# EAGLE board Schematic_Sensing_Module (EAGLE 9.6.2)
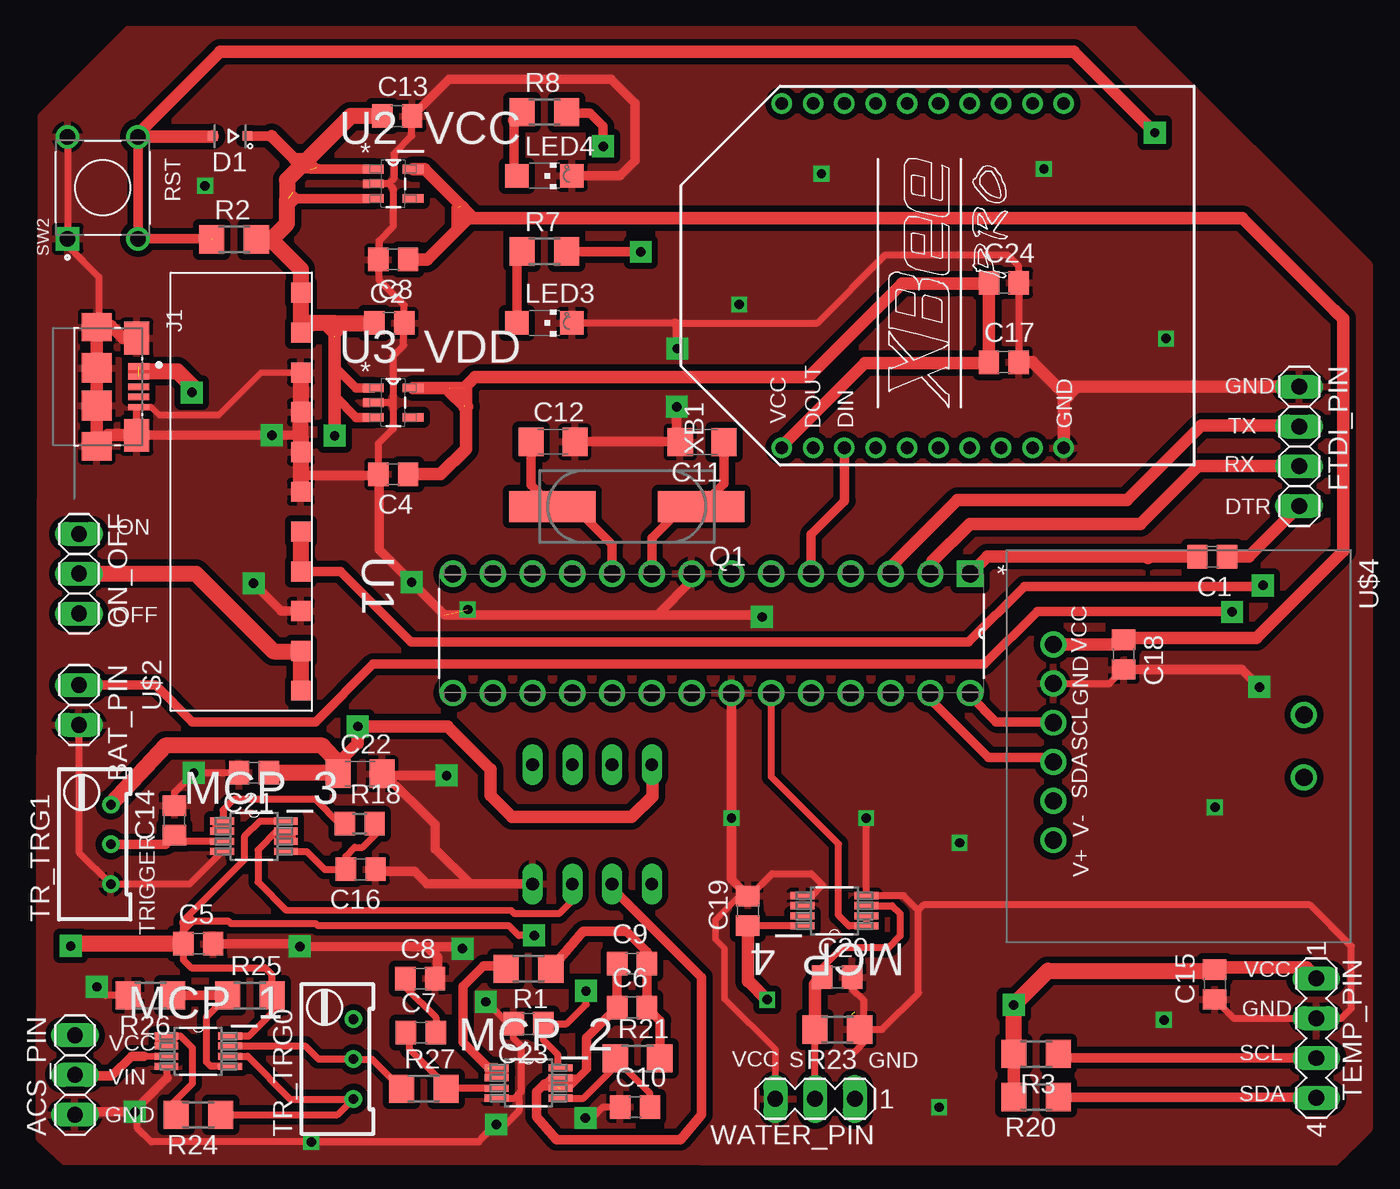
[diagram p0: board, top side]
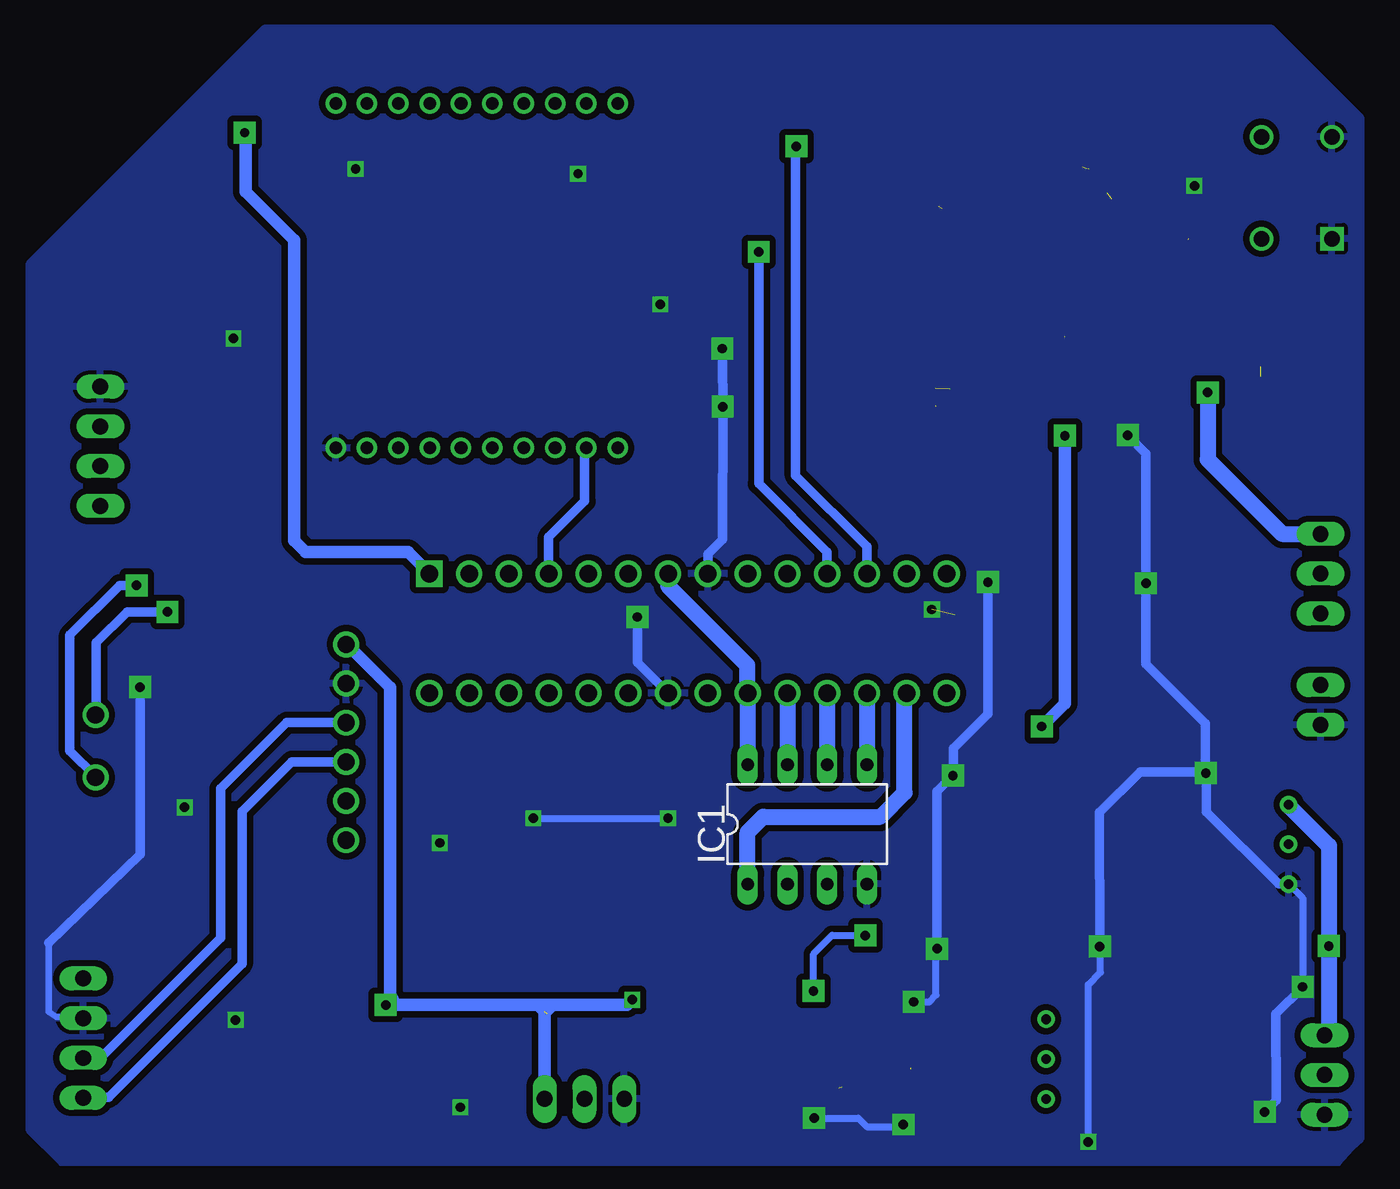
[diagram p1: board, bottom side, seen from below]

No outline drawn. Coordinates in mm, seen from the top.
Copper layers (1*16): Top 0.035mm / dielectric 1.5mm / Bottom 0.035mm
Design rules "default *": minimum track width 10mil, minimum drill 24mil, track to track 15.75mil, track to pad 15.75mil, pad to pad 12mil, via to via 12mil, smd to smd 12mil, copper to edge 40mil, drill to drill 12mil, minimum pad ring 10mil, minimum via ring 8mil, stop-mask expansion 4mil, vias tented up to drill 0mil, thermal gap 10mil

## Footprints (pad centres in the part's own frame; a part is rotated, then mirrored left to right if it is on the bottom)
1X03 = drill 1.016 long: 1 -2.54,0; 2 0,0; 3 2.54,0
1X02 = drill 1.016 long: 1 -1.27,0; 2 1.27,0
C0805 = smd 1.3 x 1.5: 1 -0.95,0; 2 0.95,0
C1206 = smd 1.6 x 1.8: 1 -1.4,0; 2 1.4,0
SOD323 = smd 0.6 x 0.6: A 1.1,0; C -1.1,0
1X04 = drill 1.016 long: 1 -3.81,0; 2 -1.27,0; 3 1.27,0; 4 3.81,0
DIL8 = drill 0.813 long: 1 -3.81,-3.81; 2 -1.27,-3.81; 3 1.27,-3.81; 4 3.81,-3.81; 5 3.81,3.81; 6 1.27,3.81; 7 -1.27,3.81; 8 -3.81,3.81
AMPHENOL_10118192-0001LF = smd 0.4 x 1.35: 1 -1.3,0; 2 -0.65,0; 3 0,0; 4 0.65,0; 5 1.3,0 | smd 2.1 x 1.6: SH1 -3.1,-0.125; SH2 3.1,-0.125 | smd 1.8 x 1.9: SH3 -3.8,-2.675; SH6 3.8,-2.675 | smd 1.9 x 1.9: SH4 -1.2,-2.675; SH5 1.2,-2.675
CHIPLED_1206 = smd 1.5 x 1.5: A 0,-1.75; C 0,1.75
SOP65P490X110-8N = smd 1.524 x 0.457: 1 -2.032,0.965; 2 -2.032,0.33; 3 -2.032,-0.33; 4 -2.032,-0.965; 5 2.032,-0.965; 6 2.032,-0.33; 7 2.032,0.33; 8 2.032,0.965
CSM-7X-DU = smd 5.5 x 2: 1 -4.75,0; 2 4.75,0
R1206 = smd 1.6 x 1.803: 1 -1.422,0; 2 1.422,0
R0805 = smd 1.3 x 1.5: 1 -0.95,0; 2 0.95,0
SW_1825910-6-4 = drill 0.99 square: 1 -3.25,2.25 | drill 0.99: 2 3.25,2.25; 3 -3.25,-2.25; 4 3.25,-2.25
MA04-1 = drill 1.016 long: 1 -3.81,0; 2 -1.27,0; 3 1.27,0; 4 3.81,0
RTRIM64W = drill 0.61: 1 1.27,-2.54; 2 1.27,0; 3 1.27,2.54
DIP254P762X457-28 = drill 1.118 square: 1 -7.62,33.02 | drill 1.118: 2 -7.62,30.48; 3 -7.62,27.94; 4 -7.62,25.4; 5 -7.62,22.86; 6 -7.62,20.32; 7 -7.62,17.78; 8 -7.62,15.24; 9 -7.62,12.7; 10 -7.62,10.16; 11 -7.62,7.62; 12 -7.62,5.08; 13 -7.62,2.54; 14 -7.62,0; 15 0,0; 16 0,2.54; 17 0,5.08; 18 0,7.62; 19 0,10.16; 20 0,12.7; 21 0,15.24; 22 0,17.78; 23 0,20.32; 24 0,22.86; 25 0,25.4; 26 0,27.94; 27 0,30.48; 28 0,33.02
SOT95P275X110-5N = smd 1.321 x 0.559: 1 -1.27,0.94; 2 -1.27,0; 3 -1.27,-0.94; 4 1.27,-0.94; 5 1.27,0.94
UPS-LIPO = smd 1.27 x 1.27: BAT+ -5.08,-3.81; BAT+1 -2.54,-3.81; GNDBAT 0,-3.81; GNDBAT1 2.54,-3.81; GNDVIN -7.62,-3.81; GNDVOUT 5.08,-3.81; GNDVOUT1 7.62,-3.81; VIN -12.7,-3.81; VIN1 -10.16,-3.81; VOUT 12.7,-3.81; VOUT1 10.16,-3.81
INA219_BB = drill 1.1: GND -4,-8; SCL -1.5,-8; SDA 1,-8; VCC -6.5,-8; VIN1+ 2,8; VIN1- -2,8; VIN+ 6,-8; VIN- 3.5,-8
MA03-1 = drill 1.016 long: 1 -2.54,0; 2 0,0; 3 2.54,0
XBEE-PRO = drill 0.8 pad 1.27: 1 -11,9; 2 -11,7; 3 -11,5; 4 -11,3; 5 -11,1; 6 -11,-1; 7 -11,-3; 8 -11,-5; 9 -11,-7; 10 -11,-9; 11 11,-9; 12 11,-7; 13 11,-5; 14 11,-3; 15 11,-1; 16 11,1; 17 11,3; 18 11,5; 19 11,7; 20 11,9

## Placement (x,y rotation side)
ACS_PIN  [1X03]  3.88,6.53 90 top
BAT_PIN  [1X02]  4.13,30.15 270 top
C1  0.1u  [C0805]  76.48,39.62 180 top
C2  [C0805]  23.94,54.53 0 top
C3  [C0805]  24.2,58.6 180 top
C4  [C0805]  24.2,44.88 180 top
C5  0.1u  [C0805]  11.75,14.91 0 top
C6  10n  [C0805]  39.44,10.84 0 top
C7  10n  [C0805]  25.96,9.24 0 top
C8  10n  [C0805]  25.92,12.69 0 top
C9  10n  [C0805]  39.44,13.64 0 top
C10  10n  [C0805]  39.64,4.49 0 top
C11  22p  [C1206]  43.92,46.93 180 top
C12  22p  [C1206]  34.39,46.95 0 top
C13  [C0805]  24.45,67.74 0 top
C14  0.1u  [C0805]  10.23,22.78 90 top
C15  0.1u  [C0805]  76.64,12.31 90 top
C16  1u  [C0805]  22.12,19.65 180 top
C17  8.2pF  [C0805]  63.17,52.04 0 top
C18  0.1u  [C0805]  70.83,33.37 270 top
C19  0.1u  [C0805]  46.84,17.01 90 top
C20  1u  [C0805]  52.54,12.76 0 top
C21  0.1u  [C0805]  15.31,25.83 180 top
C22  0.1u  [C1206]  22.08,25.76 0 top
C23  0.1u  [C0805]  32.83,9.8 180 top
C24  [C0805]  63.18,57.1 0 top
D1  1N4148WS  [SOD323]  13.78,66.47 180 top
FTDI_PIN  [1X04]  82.03,46.66 270 top
IC1  MCP3202P  [DIL8]  36.9,22.53 0 bottom
J1  10118192-0001LF  [AMPHENOL_10118192-0001LF]  7.94,50.47 270 top
LED3  [CHIPLED_1206]  33.85,54.53 270 top
LED4  [CHIPLED_1206]  33.85,63.93 270 top
MCP_1  MCP6002-I/MS  [SOP65P490X110-8N]  11.75,8.05 0 top
MCP_2  MCP6002-I/MS  [SOP65P490X110-8N]  32.83,6.02 0 top
MCP_3  MCP6002-I/MS  [SOP65P490X110-8N]  15.31,21.77 0 top
MCP_4  MCP6002-I/MS  [SOP65P490X110-8N]  52.36,17.01 180 top
ON_OFF  [1X03]  4.13,38.53 270 top
Q1  CSM-7X-DU  [CSM-7X-DU]  39.11,42.82 180 top
R1  560  [R1206]  32.83,13.3 180 top
R2  10k  [R1206]  14.04,59.87 0 top
R3  1.5k  [R1206]  65.24,7.87 180 top
R7  560  [R1206]  33.85,59.1 0 top
R8  560  [R1206]  33.85,67.99 0 top
R18  15k  [R0805]  22.05,22.57 0 top
R20  1.5k  [R1206]  65.24,5.11 180 top
R21  10k  [R1206]  39.79,7.58 0 top
R23  560  [R1206]  52.55,9.43 180 top
R24  10k  [R1206]  11.75,3.99 180 top
R25  10k  [R1206]  15.05,11.61 0 top
R26  10k  [R1206]  8.7,11.61 180 top
R27  22k  [R1206]  26.15,5.65 0 top
SW2  1825910-6  [SW_1825910-6-4]  5.66,63.17 90 top
TEMP_PIN  [MA04-1]  83.13,8.88 270 top
TR_TRG0  20k  [RTRIM64W]  20.39,7.54 0 top
TR_TRG1  20K  [RTRIM64W]  4.89,21.26 0 top
U1  ATMEGA328P-PU  [DIP254P762X457-28]  28.01,30.91 270 top
U2_VCC  NCP699SN33T1G  [SOT95P275X110-5N]  24.2,63.42 0 top
U3_VDD  NCP699SN33T1G  [SOT95P275X110-5N]  24.2,49.45 0 top
U$2  UPS-LIPO  [UPS-LIPO]  14.49,43.76 90 top
U$4  INA219_BB  [INA219_BB]  74.34,27.52 270 top
WATER_PIN  [MA03-1]  51.12,5 180 top
XB1  XBEE-PRO  [XBEE-PRO]  58,57.55 90 top

## Library data of the parts
ACS_PIN BAT_PIN FTDI_PIN ON_OFF = pinhead
C1-C24 R1-R3 R7 R8 R20 R21 R23-R27 TR_TRG0 TR_TRG1 = rcl
D1 = 1N4148WS; AVAILABILITY: Unavailable; DESCRIPTION: Diode Switching 75V 0.3A 2-Pin SOD-323 T/R; MF: ON Semiconductor; MP: 1N4148WS; PACKAGE: S-0 Good-Ark; PRICE: None
IC1 = microchip; MF: MICROCHIP; MPN: MCP3202-CI/P; OC_FARNELL: 1196794; OC_NEWARK: 72K7287
J1 = USB-B-2.0; AVAILABILITY: Unavailable; DESCRIPTION: Single Port 5 Contact Horizontal Right Angle Shielded Micro B USB 2.0 Connector; MF: Amphenol ICC; MP: 10118192-0001LF; PACKAGE: None; PRICE: None
LED3 LED4 = led
MCP_1 = MCP6002-I_MS-2; AVAILABILITY: Unavailable; DESCRIPTION: Microchip MCP6002-I/MS, Dual Op Amp, 1MHzCMOS, Rail to Rail, 3V, 5V, 8-Pin MSOP; MF: Microchip; MP: MCP6002-I/MS; PACKAGE: MSOP-8 Microchip; PRICE: None
MCP_2-MCP_4 = MCP6002-I_MS; DESCRIPTION: Microchip MCP6002-I/MS, Dual Op Amp, 1MHzCMOS, Rail to Rail, 3V, 5V, 8-Pin MSOP; DIGI-KEY_PART_NUMBER: MCP6002-I/MS-ND; DIGI-KEY_PURCHASE_URL: https://www.digikey.com.co/product-detail/en/microchip-technology/MCP6002-I-MS/MCP6002-I-MS-ND/500874?utm_source=snapeda&utm_medium=aggregator&utm_campaign=symbol; MF: Microchip; MP: MCP6002-I/MS; PACKAGE: MSOP-8 Microchip
Q1 = crystal; OC_FARNELL: unknown; OC_NEWARK: unknown
R18 = resistor
SW2 = button1825910-6; AVAILABILITY: Unavailable; COMMENT: 1825910-6; CONFIGURATION_POLE-THROW: Single Pole - Single Throw; CONTACT_CURRENT_RATING: 50 mA; DESCRIPTION: Switch Push Button OFF _ON_ SPST Round Button 0.05A 24VDC Momentary Contact PC Pins Thru-Hole; EU_ROHS_COMPLIANCE: Compliant; MF: TE Connectivity; MP: 1825910-6; PACKAGE: None; PRICE: None; TE_PURCHASE_URL: https://www.te.com/usa-en/product-1825910-6.html?te_bu=Cor&te_type=disp&te_campaign=seda_glo_cor-seda-global-disp-prtnr-fy19-seda-model-bom-cta_sma-317_1&elqCampaignId=32493
TEMP_PIN WATER_PIN = con-lstb; OC_FARNELL: unknown; OC_NEWARK: unknown
U1 = Atmel_By_element14_Batch_1-00; MPN: ATMEGA328P-PU; OC_FARNELL: 1715487; OC_NEWARK: 15R0268; PACKAGE: PDIP-28; SUPPLIER: Atmel
U2_VCC U3_VDD = NCP699SN33T1G; DESCRIPTION: Linear Voltage Regulator, CMOS LDO, Low Iq and Low IGND, 150 mA, with Enable Vout: 3.3 V; DIGI-KEY_PART_NUMBER: NCP699SN33T1GOSCT-ND; DIGI-KEY_PURCHASE_URL: https://www.digikey.com.co/product-detail/en/on-semiconductor/NCP699SN33T1G/NCP699SN33T1GOSCT-ND/1630380?utm_source=snapeda&utm_medium=aggregator&utm_campaign=symbol; MF: ON Semiconductor; MP: NCP699SN33T1G; PACKAGE: TSOP-5 ON Semiconductor
U$2 = CHARGER-LIPO-5V
U$4 = INA219_BB
XB1 = maxstream; MPN: XBP24-AWI-001; OC_FARNELL: 1337916; OC_NEWARK: 42M2667

## Nets
+5V: ACS_PIN.3 C2.1 C5.1 C13.1 C21.1 C22.1 C23.1 D1.C IC1.8 MCP_1.8 MCP_2.8 MCP_3.8 R2.2 R25.2 TR_TRG1.3 U1.7 U1.20 U2_VCC.1 U2_VCC.3 U3_VDD.1 U3_VDD.3 U$2.VOUT U$2.VOUT1
A0: MCP_4.1 MCP_4.2 U1.23
A1: U1.24
A2: U1.25
A3: U1.26
AMISO: IC1.6 U1.18
AMOSI: IC1.5 U1.17
ASCK: IC1.7 U1.19
ASS: IC1.1 U1.16
B+: U$2.BAT+ U$2.BAT+1 U$4.VIN1+
B-INA: BAT_PIN.1 U$4.VIN1-
BATH: R8.2 U1.12
BATL: R7.2 U1.11
DTR: C1.1 FTDI_PIN.4
DWS: C20.1 MCP_4.3 R23.2 WATER_PIN.2
GND: ACS_PIN.1 BAT_PIN.2 C2.2 C3.2 C4.2 C5.2 C8.2 C10.1 C11.2 C12.2 C13.2 C14.2 C15.1 C16.1 C17.2 C18.2 C19.2 C20.2 C21.2 C22.2 C23.2 C24.2 FTDI_PIN.1 IC1.4 J1.5 J1.SH1 J1.SH2 J1.SH3 J1.SH4 J1.SH5 J1.SH6 LED3.C LED4.C MCP_1.4 MCP_2.4 MCP_3.4 MCP_4.4 MCP_4.5 MCP_4.6 R23.1 R26.2 SW2.1 SW2.2 TEMP_PIN.2 TR_TRG1.1 U1.8 U1.22 U2_VCC.2 U3_VDD.2 U$2.GNDBAT U$2.GNDBAT1 U$2.GNDVIN U$2.GNDVOUT U$2.GNDVOUT1 U$4.GND WATER_PIN.3 XB1.10
N$1: J1.1 J1.2 ON_OFF.1
N$3: LED3.A R7.1
N$4: LED4.A R8.1
N$5: C7.2 C8.1
N$13: C6.2 C9.2 R1.1 R21.2
OSC+: C11.1 Q1.1 U1.9
OSC-: C12.1 Q1.2 U1.10
RST: C1.2 D1.A R2.1 SW2.3 SW2.4 U1.1
RX0: FTDI_PIN.3 U1.2
RX1: U1.4 XB1.2
SCL: R3.1 TEMP_PIN.3 U1.28 U$4.SCL
SDA: R20.1 TEMP_PIN.4 U1.27 U$4.SDA
TX0: FTDI_PIN.2 U1.3
TX1: U1.5 XB1.3
VBTR: C16.2 MCP_3.5 R18.2
VCC33: C3.1 C15.2 C18.1 C19.1 MCP_4.8 R3.2 R20.2 TEMP_PIN.1 U2_VCC.5 U$4.VCC WATER_PIN.1
VDD33: C4.1 C17.1 C24.1 U3_VDD.5 XB1.1
VIN_CURR: ACS_PIN.2 MCP_1.3
VINA+_MCP_2: C7.1 MCP_2.3 R27.2
VINADC0: C6.1 C9.1 IC1.2 MCP_2.6 MCP_2.7
VINADC1: IC1.3 MCP_3.6 MCP_3.7
VINB+_MCP_1: MCP_1.5 R25.1 R26.1
VINB+_MCP_2: C10.2 MCP_2.5 R21.1
VINB-_MCP_1: MCP_1.6 R24.1 TR_TRG0.1
VOA: MCP_1.1 MCP_1.2 R24.2
VOA_MCP_2: MCP_2.1 MCP_2.2 R1.2
VOATR: MCP_3.1 MCP_3.2 R18.1
VOB: MCP_1.7 R27.1 TR_TRG0.2
VTR: C14.1 MCP_3.3 TR_TRG1.2
VUSB: ON_OFF.2 U$2.VIN U$2.VIN1

## Tracks (layer width: path | path; a pad name or v marks a point on that pad's centre or on a via)
+5V  (via drill 0.6 pad 1.4)  (5 unrouted)
  Top 0.406: 17.69,61.97 17.69,61.99 18.04,62.34 18.04,62.61 17.79,62.86 | 19.44,64.49 19.34,64.49 19.14,64.69
  Top 0.457: MCP_1.8 14.99,9.01 16.66,10.69 16.66,11.43 R25.2 16.42,11.66 16.42,12.95 16,13.37 11.31,13.37 10.8,13.88 C5.1 | 10.86,14.97 C5.1 | 10.8,16.13 C5.1 | 10.8,16.13 10.8,16.37 11.11,16.68 | 11.11,16.68 14.69,20.26 14.69,21.17 14.69,21.18 14.69,21.75 15.67,22.73 MCP_3.8 | 10.82,16.11 10.8,16.13 | 20.46,53.65 20.49,53.65 21.09,54.25 | 11.43,16.37 11.46,16.34 13.69,16.34 13.85,16.18 19.27,16.18 19.39,16.05 31.59,16.05 32.2,15.43 v33.2,15.43 | 11.43,16.37 11.11,16.68 | C5.1 10.8,15.74 11.43,16.37 | C23.1 33.78,8.75 34.7,7.83 34.7,7.15 MCP_2.8 | C23.1 34.27,9.8 | C23.1 35.27,9.8 36.51,11.03 v36.51,11.89 v36.5,11.89
  Top 0.61: U2_VCC.3 17.49,62.48 17.42,62.41 | U2_VCC.1 18.91,64.36 18.51,64.77 | D1.C 16.42,66.47 | 20.4,54.53 20.45,54.48 20.45,53.66 20.45,52.42 20.47,52.41 20.47,49.88 21.84,48.51 U3_VDD.3 | 20.47,53.66 20.47,53.8 21.06,54.39 19.75,54.39 | 19.66,54.39 19.75,54.39 | 19.75,54.39 20.4,53.75 | 19.07,64.39 18.33,64.39 | U3_VDD.1 21.83,50.39 20.45,51.77
  Top 0.813: 16.42,66.47 17.89,65 18.27,65 18.51,64.77 | 20.45,53.66 20.45,51.77 v20.45,47.34 | 20.68,26.45 21.93,27.7 v21.93,28.78 27.66,28.78 30.42,26.02 30.42,24.37 31.79,23 39.42,23 40.75,24.33 40.75,26.3 IC1.8 | R2.2 16.4,59.87
  Top 1.016: C13.1 21.48,67.74 18.51,64.77 17.42,63.67 17.42,62.41 17.42,60.88 16.4,59.87 18.3,57.97 U$2.VOUT U$2.VOUT1 18.91,54.53 20.4,54.53 C2.1 | C21.1 20.6,25.83 C22.1 20.68,26.45 19.67,27.56 9.66,27.56 TR_TRG1.3 | C5.1 3.75,14.91 v3.61,14.77
  Bottom 0.457: 36.5,12.43 v36.5,11.89 36.5,14.26 35.31,15.45 33.22,15.45 v33.2,15.43
  Bottom 0.813: v20.45,47.34 20.45,30.25 v21.93,28.78
  Bottom 1.016: IC1.8 U1.20 40.73,30.93 40.73,32.69 45.79,37.75 U1.7 | ACS_PIN.3 3.61,9.34 v3.61,14.77 3.61,21.16 6.17,23.72 TR_TRG1.3
A0
  Top 0.406: MCP_4.2 MCP_4.1
  Top 0.457: U1.23 48.33,25.56 52.63,21.27 52.63,16.71 53.3,16.04 MCP_4.1
AMISO
  Bottom 1.016: U1.18 IC1.6
AMOSI
  Bottom 1.016: U1.17 IC1.5
ASCK
  Bottom 1.016: U1.19 IC1.7
ASS
  Bottom 1.016: IC1.1 40.71,22.01 39.72,23 32.24,23 30.69,24.56 30.69,30.77 U1.16
B+  (via drill 0.6 pad 1.4)
  Top 0.61: U$2.BAT+ 20.84,38.68 25.35,34.17 60.93,34.17 64.47,37.71 79.64,37.71 v79.72,37.78
  Top 1.016: U$2.BAT+1 U$2.BAT+
  Bottom 0.61: v79.72,37.78 80.8,37.78 83.97,34.61 83.97,27.21 82.34,25.57 U$4.VIN1+
B-INA  (via drill 0.6 pad 1.4)
  Top 0.61: BAT_PIN.1 9.02,31.42 11.35,29.08 19.24,29.08 22.91,32.76 61.93,32.76 65.3,36.13 77.71,36.13 v77.75,36.1
  Bottom 0.61: v77.75,36.1 80.33,36.1 82.3,34.12 82.3,29.55 U$4.VIN1-
BATH  (via drill 0.6 pad 1.4)
  Top 0.61: v37.6,65.81 37.6,67.1 36.77,67.92 35.34,67.92 R8.2
  Bottom 0.61: U1.12 33.09,40.25 37.64,44.81 37.64,65.77 v37.6,65.81
BATL  (via drill 0.6 pad 1.4)
  Top 0.61: v40,59.08 39.97,59.1 R7.2
  Top 0.813: 35.37,59 R7.2
  Bottom 0.61: U1.11 35.63,39.91 40,44.27 v40,59.08
DTR
  Top 0.813: C1.1 78.8,39.62 FTDI_PIN.4
DWS
  Top 0.406: 51.45,12.9 C20.1
  Top 0.457: C20.1 51.59,13.4 52.84,14.64 55.79,14.64 56.55,15.39 56.55,16.83 56.04,17.34 MCP_4.3 | WATER_PIN.2 R23.2
  Top 0.813: C20.1 51.13,12.3 R23.2
GND  (via drill 0.6, 0.6 pad 1.4)  (1 unrouted)
  Top 0.406: J1.5 8.75,49.17 9.25,48.67 13.06,48.67 15.75,51.37 18.29,51.37 U$2.GNDVOUT1 | WATER_PIN.3 48.58,8.16 45.34,11.4 45.34,14.62 44.77,15.19 44.77,16.43 46.12,17.78 46.66,17.78 C19.2
  Top 0.432: J1.SH2 7.82,49.04
  Top 0.457: 9.77,6.33 9.77,7.04 MCP_1.4 | MCP_2.4 31.94,5.05 32.23,5.34 | 32.35,5.46 32.37,5.48 | 53.66,8.02 54.41,8.77 54.41,8.99 R23.1 | C20.2 53.49,12.04 54.22,11.31 54.22,9.67 R23.1 | C19.2 46.96,17.95 48.38,19.38 50.88,19.38 51.61,18.65 50.94,17.97 MCP_4.5 | R23.1 55.4,9.43 57.75,11.78 57.71,11.82 57.71,17.04 | 57.71,17.04 56.77,17.97 MCP_4.4 54.4,22.91 v54.39,22.92 | U$4.GND 69.93,31.52 C18.2 | C17.2 C24.2 64.09,57.14 64.09,58.19 63.39,58.89 55.63,58.89 51.27,54.53 42.17,54.53 LED3.C | C4.2 23.25,46.86 24.1,47.71 | 24.1,47.71 24.12,47.71 24.19,47.78 | 24.17,49.2 23.92,49.45 U3_VDD.2 23.64,49.45 | 24.17,49.2 24.17,47.78 24.1,47.71 | 23.9,63.42 U2_VCC.2 23.59,63.42 | 23.9,63.42 24.19,63.14 24.19,60.67 23.28,59.77 23.28,58.63 C3.2 23.31,58.54 23.31,57.26 24.89,55.68 C2.2 24.87,54.51 24.87,53.1 24.18,52.41 24.18,49.21 24.17,49.2 | C13.2 25.38,67.72 25.38,66.48 24.24,65.34 24.24,63.76 23.9,63.42 | J1.SH3 5.41,54.41 5.41,57.47 3.41,59.47 SW2.1 SW2.2 | C15.1 77.85,10.15 TEMP_PIN.2 84.73,10.15 85.37,10.79 85.37,14.75 82.73,17.39 58.06,17.39 57.71,17.04 | BAT_PIN.2 4.13,20.75 TR_TRG1.1 11.19,18.72 MCP_3.4 | C21.2 11.48,25.83 v11.46,25.8 10.23,24.57 C14.2 | R26.2 5.83,11.61 v5.28,12.15 | 32.23,5.34 32.23,4.89 32.26,4.86 32.26,4.27 31.36,3.36 v30.77,3.36 | 29.82,2.48 30.7,3.36 v30.77,3.36 | v18.96,2.26 29.66,2.26 | v18.96,2.26 8.75,2.26 7.87,3.14 7.87,4.01 v7.7,4.17 | C10.1 38.59,4.49 37.6,4.49 36.89,3.78 v36.46,3.78 | 32.35,5.46 32.35,8.4 31.89,8.87 C23.2 31.57,9.8 30.2,11.17 30.14,11.17 v30.11,11.2 | 32.35,5.46 32.23,5.34 | 29.66,2.26 v30.77,3.36 | 29.66,2.26 v18.96,2.26
  Top 0.61: C13.2 27.78,70.11 38.11,70.11 39.64,68.58 39.64,64.89 38.68,63.93 LED4.C | J1.SH2 v16.44,47.37 18.12,47.37 18.3,47.18 | U$2.GNDVIN 17.05,36.14 v15.28,37.92 | C5.2 18.24,14.91 v18.23,14.72 25.36,14.72 | 25.36,14.72 25.96,14.72 28.48,14.72 v28.61,14.59 | C8.2 27.02,12.85 27.02,14.06 26.36,14.72 25.36,14.72 | 29.12,18.72 IC1.4 | 29.12,18.72 26.36,18.72 25.57,19.52 23.21,19.52 C16.1 | 29.12,18.72 26.86,20.97 26.86,22.52 23.62,25.76 C22.2 23.59,25.64 v27.6,25.64 | 3.15,3.85 3.74,3.85 ACS_PIN.1 4.07,4.17 v7.7,4.17 7.7,4.27 9.77,6.33 | U1.8 43.25,38.09 41.06,35.9 | 41.06,35.9 27.46,35.9 v25.37,37.99 23.28,40.08 23.28,44.85 | 23.28,44.85 C4.2 | U1.22 v45.79,22.92 45.79,19.01 C19.2 | 41.06,35.9 47.61,35.9 v47.74,35.76 | v42.3,49.19 42.3,47.16 C11.2 42.49,46.95 C12.2 | v42.33,52.9 42.34,54.36 42.17,54.53 | C18.2 78.37,32.41 v79.5,31.29 | 18.3,44.8 23.23,44.8 23.28,44.85
  Top 0.813: J1.SH1 6.95,53.57 6.18,54.34 5.34,54.34 J1.SH3 J1.SH4 J1.SH5 J1.SH6 5.97,47.37 J1.SH2 | C17.2 65,52.04 66.57,50.47 | XB1.10 67,50.04 66.57,50.47 | FTDI_PIN.1 66.57,50.47 | 67,49.64 67.03,49.64 67.69,50.3
  Top 1.016: J1.SH3 5.51,54.02 | U$2.GNDBAT 18.3,44.8 U$2.GNDBAT1 18.3,47.18 U$2.GNDVOUT U$2.GNDVOUT1
  Bottom 0.406: 85.33,14.96 85.33,10.57 84.84,10.25 83.77,10.25 83.67,10.15 TEMP_PIN.2
  Bottom 0.457: v5.28,12.15 5.28,17.83 TR_TRG1.1 | v30.11,11.2 29.11,11.2 28.67,11.63 28.67,14.52 v28.61,14.59 | v36.46,3.78 33.65,3.78 33.09,3.22 30.9,3.22 v30.77,3.36 | v54.39,22.92 v45.79,22.92 | v18.96,2.26 18.96,12.28 18.18,13.07 18.18,14.67 v18.23,14.72
  Bottom 0.61: 6.04,18.59 TR_TRG1.1 6.81,18.72 11.43,23.34 11.43,25.77 v11.46,25.8 | v16.44,47.37 15.28,46.2 v15.28,37.92 15.28,32.78 11.48,28.98 11.48,25.83 v11.46,25.8 | v18.23,14.72 18.25,23.28 15.65,25.88 11.54,25.88 v11.46,25.8 | v7.7,4.17 6.97,4.91 6.97,10.43 5.28,12.12 v5.28,12.15 | v25.37,37.99 25.37,29.57 27.56,27.38 27.56,25.68 v27.6,25.64 28.61,24.63 v28.61,14.59 | v47.74,35.76 47.74,32.87 U1.22 | U1.8 43.25,39.8 42.32,40.73 v42.3,49.19 42.32,52.16 v42.33,52.9 | v79.5,31.29 79.5,20.62 85.33,14.96
  other vias: 12.19,63.3 51.54,64.07 65.74,64.37 46.28,55.73 73.54,53.55 76.65,23.62 60.36,21.34 59.05,4.46 73.4,10.04 28.95,36.25
  pour Top (isolate 0.4): 3.2,0.98 1.61,2.45 1.73,67.77 7.26,73.3 71.48,73.3 86.49,58.29 86.49,3.05 85.4,1.96 85.36,1.96 84.99,1.59 84.99,1.57 84.33,0.91
  pour Bottom (isolate 0.4): 2.18,1.88 3.03,0.91 84.5,0.91 86.57,2.97 86.57,58.35 71.53,73.39 7.28,73.39 1.58,67.69 1.58,2.42
N$1  (via drill 0.6 pad 1.4)  (2 unrouted)
  Top 1.016: 7.94,51.46 10.41,51.46 11.33,50.53 v11.33,50.1 v11.34,50.1
  Bottom 1.016: v11.34,50.1 11.34,45.83 6.58,41.08 ON_OFF.1
N$3
  Top 0.61: LED3.A 32.1,58.77
  Top 0.813: 32.1,58.77 R7.1
N$4
  Top 0.61: 31.91,67.47 31.91,64.11
  Top 0.813: R8.1 31.91,67.47 | 31.91,64.11 LED4.A
N$5
  Top 0.457: C8.1 24.97,12.16 26.93,10.2 26.93,9.25 C7.2
N$13
  Top 0.61: C6.2 40.56,10.67 | C6.2 C9.2 40.39,14.4 39.09,15.7 36.31,15.7 R1.1 | R21.2 41.24,9.99 C6.2
OSC+
  Top 0.61: U1.9 40.71,40.81 42.59,42.7 | C11.1 45.32,44.28 Q1.1
  Top 1.016: 42.59,42.7 43.74,42.7 Q1.1
OSC-
  Top 0.61: U1.10 38.17,40.4 36.07,42.5 | C12.1 32.99,44.18 Q1.2
  Top 1.016: 36.07,42.5 34.67,42.5 Q1.2
RST  (via drill 0.6 pad 1.4)  (1 unrouted)
  Top 0.457: D1.A 12.62,66.4
  Top 0.61: 8.48,59.92 SW2.3 | 8.48,59.92 12.56,59.92 | SW2.4 7.91,60.49 8.48,59.92
  Top 0.813: 7.96,66.47 SW2.4 | 7.96,59.87 SW2.3 | SW2.4 12.63,66.42 D1.A | SW2.4 7.91,66.61 13.14,71.84 67.66,71.84 v72.82,66.69 | 61.13,38.53 U1.1 62.12,39.62 72.46,39.62 | 72.46,39.62 72.36,39.52 | C1.2 72.46,39.62
  Bottom 0.813: U1.1 61.03,38.56 62.39,39.92 68.92,39.92 69.65,40.65 69.65,59.82 72.75,62.92 72.75,66.62 v72.82,66.69
RX0
  Top 0.813: FTDI_PIN.3 75.58,45.39 71.89,41.7 61,41.7 58.62,39.32 58.62,38.66 U1.2
RX1
  Bottom 0.61: U1.4 53.41,40.86 51.11,43.16 51.11,46.44 XB1.2
SCL
  Top 0.61: U1.28 61.03,30.73 62.69,29.07 66.28,29.07 U$4.SCL | TEMP_PIN.3 66.93,7.61 R3.1
  Top 0.813: 82.86,7.87 TEMP_PIN.3
  Bottom 0.61: TEMP_PIN.3 82.02,7.61 74.35,15.27 74.35,24.82 70.13,29.03 66.35,29.03 U$4.SCL
SDA
  Top 0.61: U1.27 58.49,30.51 62.19,26.81 66.04,26.81 U$4.SDA | R20.1 83.08,5.11 TEMP_PIN.4
  Top 0.813: 66.7,5.07 R20.1
  Bottom 0.61: U$4.SDA 69.81,26.52 72.98,23.34 72.98,13.63 81.5,5.11 83.08,5.11 TEMP_PIN.4
TX0
  Top 0.813: U1.3 55.95,38.97 60.21,43.23 71.03,43.23 75.79,47.98 81.98,47.98 FTDI_PIN.2
TX1
  Top 0.61: U1.5 50.87,41.04 53,43.17 XB1.3
VBTR
  Top 0.457: 21.17,20 C16.2 | R18.2 23.1,22.48 23.1,21.93 22.23,21.06 21.74,21.06 21.17,20.49 C16.2 | MCP_3.5 18.68,20.8 19.83,19.65 C16.2
VCC33  (via drill 0.6, 0.6 pad 1.4)  (2 unrouted)
  Top 0.457: MCP_4.8 46.85,16.04 C19.1
  Top 0.813: TEMP_PIN.1 83.13,12.78 82.52,13.39 76.77,13.39 C15.2 | R3.2 R20.2 | C19.1 46.84,12.51 46.89,12.51 v48.07,11.33 | C3.1 26.35,58.59 28.99,61.24 | U2_VCC.5 26.19,64.36 28.68,61.87 28.68,61.56 28.99,61.24 | 28.99,61.24 29.32,61.24 | 29.32,61.24 78.42,61.24 84.28,55.37 | 84.28,55.37 | 84.28,55.37 84.84,54.81 84.84,39.97 79.3,34.43 70.94,34.43 C18.1 70.53,34.02 U$4.VCC | 28.29,61.87 28.29,60.77 28.34,60.72 | 28.52,62 28.57,62 29.32,61.24
  Top 1.016: R3.2 v63.81,11 66,13.19 76.57,13.19 C15.2
  Bottom 0.406: 52.56,11.08 52.79,11.08 53.48,10.39
  Bottom 0.813: U$4.VCC 66.28,34.02 63.52,31.26 63.52,11.39 63.48,11.34 | 54.12,11 v63.81,11 | 54.12,11 48.4,11 v48.07,11.33 | WATER_PIN.1 53.66,10.54 54.12,11
  Bottom 1.016: 63.48,11.34 v63.81,11
VDD33  (2 unrouted)
  Top 0.813: 62.11,52.15 C17.1 | 28.73,50.39 U3_VDD.5 | C4.1 27.22,44.88 28.84,46.5 28.84,50.28 28.73,50.39 | 28.73,49.22 28.91,49.22 | 27.81,50.36 27.81,50.17 28.73,49.25 | C17.1 C24.1 62.19,57.06 56.66,57.06 50.69,51.09 29.42,51.09 28.73,50.39 | XB1.1 49,46.67 54.3,51.97 62.15,51.97 C17.1
VIN_CURR
  Top 0.406: MCP_1.3 8.3,7.72
  Top 0.61: 8.3,7.72 7.49,7.72 6.24,6.47 3.93,6.47 ACS_PIN.2
VINA+_MCP_2
  Top 0.406: R27.2 27.61,5.69
  Top 0.457: C7.1 25.25,8.99 25.25,8.16 27.57,5.84 R27.2 27.61,5.69 MCP_2.3
VINADC0  (2 unrouted)
  Top 0.406: MCP_2.7 MCP_2.6 35.27,5.69 35.93,6.35 | MCP_2.7 34.5,5.98 33.86,5.98 34.23,6.35 MCP_2.7 | 35.93,6.35 MCP_2.7 | 35.93,6.35 36.54,6.96 | 34.87,5.67 35.42,5.67 36.63,6.89 | 34.67,5.75 33.79,5.75 33.77,5.73
  Top 0.61: C6.1 38.41,10.84 | C9.1 C6.1 | IC1.2 38.17,18.48 43.89,12.76 43.89,3.99 42.52,2.39 34.61,2.39 33.34,3.86 33.34,5.45 33.86,5.98 | 36.54,6.96 36.54,8.89 C6.1
VINADC1
  Top 0.406: MCP_3.6 MCP_3.7
  Top 0.457: 17.08,22.09 MCP_3.7 16.77,22.09 15.56,20.89 15.56,20.3 15.56,18.85 17.37,17.04 31.74,17.02 31.94,16.82 34.77,16.82 35.63,17.67 IC1.3 35.63,17.77
VINB+_MCP_1
  Top 0.457: MCP_1.5 12.53,7.08 12.27,7.34 12.27,10.25 R25.1
  Top 0.61: R26.1 13.07,11.61 R25.1
VINB+_MCP_2
  Top 0.457: MCP_2.5 36.35,5.05 38.05,6.74 38.05,7.26 R21.1 40.59,5.37 C10.2
  Top 0.61: R21.1 38.59,7.58 | 40.42,4.57 C10.2
VINB-_MCP_1
  Top 0.457: MCP_1.6 14.89,7.72 17.63,4.99 21.64,4.99 TR_TRG0.1 20.64,3.98 R24.1
  Top 0.61: 13.18,4.22 R24.1
VOA
  Top 0.406: MCP_1.2 MCP_1.1
  Top 0.457: MCP_1.1 10.6,9.01 11.36,8.25 11.36,5.98 10.08,4.69 10.08,4.24 R24.2
VOA_MCP_2  (1 unrouted)
  Top 0.406: MCP_2.2 MCP_2.1 | 30.24,6.4 30.24,6.85 30.29,6.9 31.36,6.9 31.37,6.9 31.37,6.46 31.33,6.42
  Top 0.61: MCP_2.1 30.28,6.98 28.64,8.62 28.64,12.17 29.97,13.5 31.27,13.5 R1.2
VOATR
  Top 0.406: MCP_3.1 MCP_3.2
  Top 0.457: R18.1 20.79,22.57 19.25,24.11 13.99,24.11 13.33,23.45 13.33,22.79 MCP_3.1
VOB
  Top 0.457: R27.1 22.84,7.54 TR_TRG0.2 19.41,7.54 18.57,8.38 MCP_1.7
VTR
  Top 0.406: 10.62,21.43 C14.1
  Top 0.457: MCP_3.3 10.62,21.43
  Top 0.61: TR_TRG1.2 9.65,21.26 C14.1
VUSB
  Top 1.016: U$2.VIN U$2.VIN1 18.27,33.57 16.55,33.57 11.6,38.53 ON_OFF.2
(copper drawn outside any net)
  shapes: Top area x9

## Text on the board
tNames: RST | GND | VCC | DOUT | DIN | GND | TX | RX | DTR | ON | VCC | OFF | GND | SCL | SDA | V- | V+ | TRIGGER | VCC | GND | VCC | VCC | S | GND | SCL | VIN | SDA | GND
tDocu: B+ | B-